# Altium PCB AlarmClockWith Mod.PcbDoc
Units mm, origin at the board's own origin, x right, y up, seen from the top; angles counter-clockwise.
Board outline 80.01 x 80.14 mm, 2 copper layers (Top Layer, Bottom Layer); 28 components, 25 nets, 108 pads, 0 vias.
Unrouted connection lines stored in the file: 6.
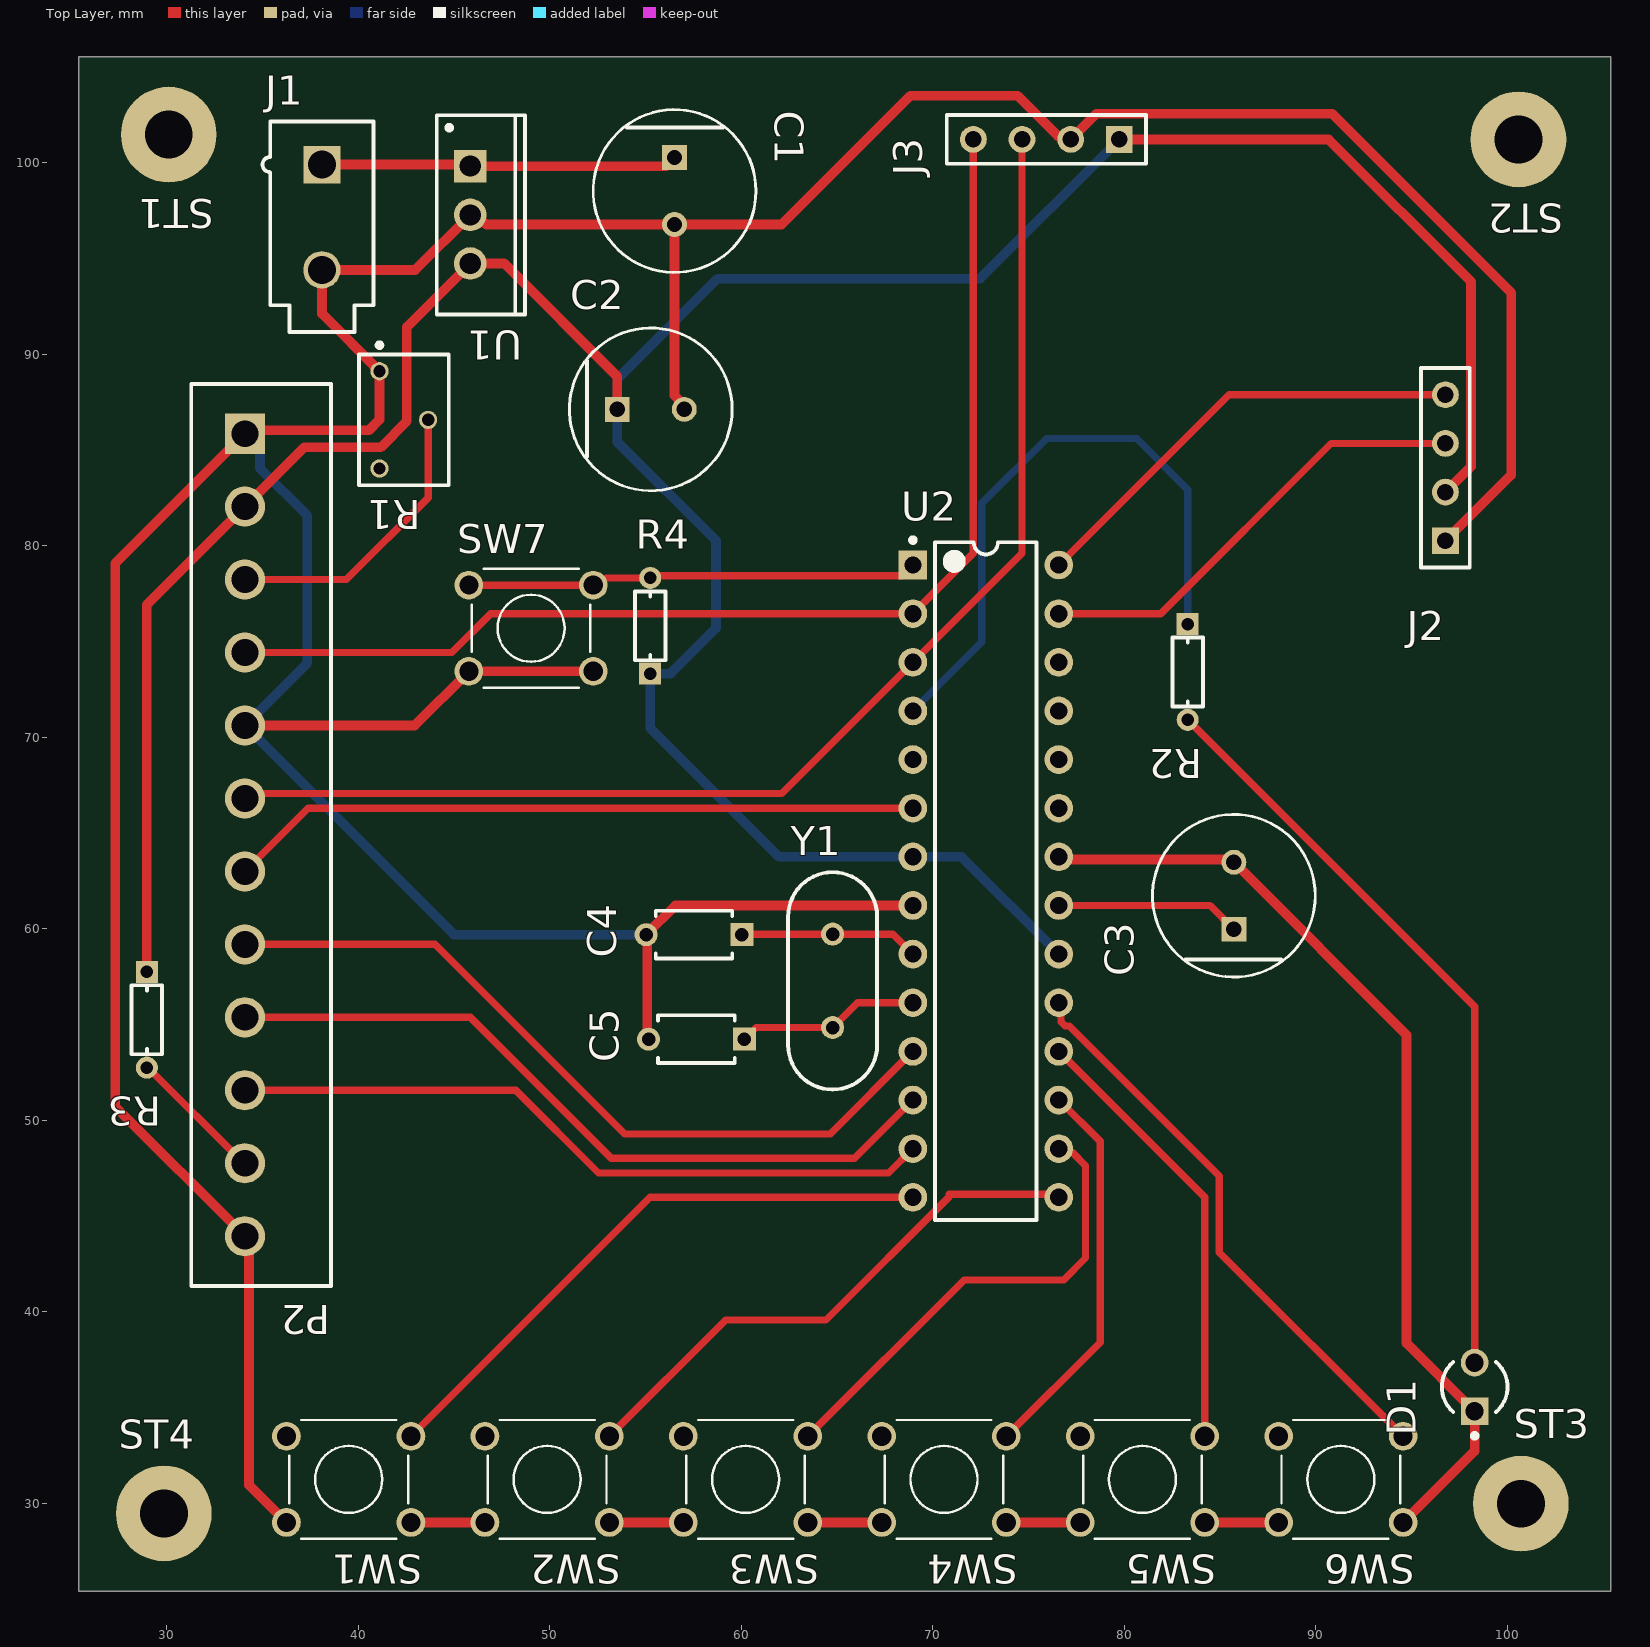
[diagram p0: Top Layer view]
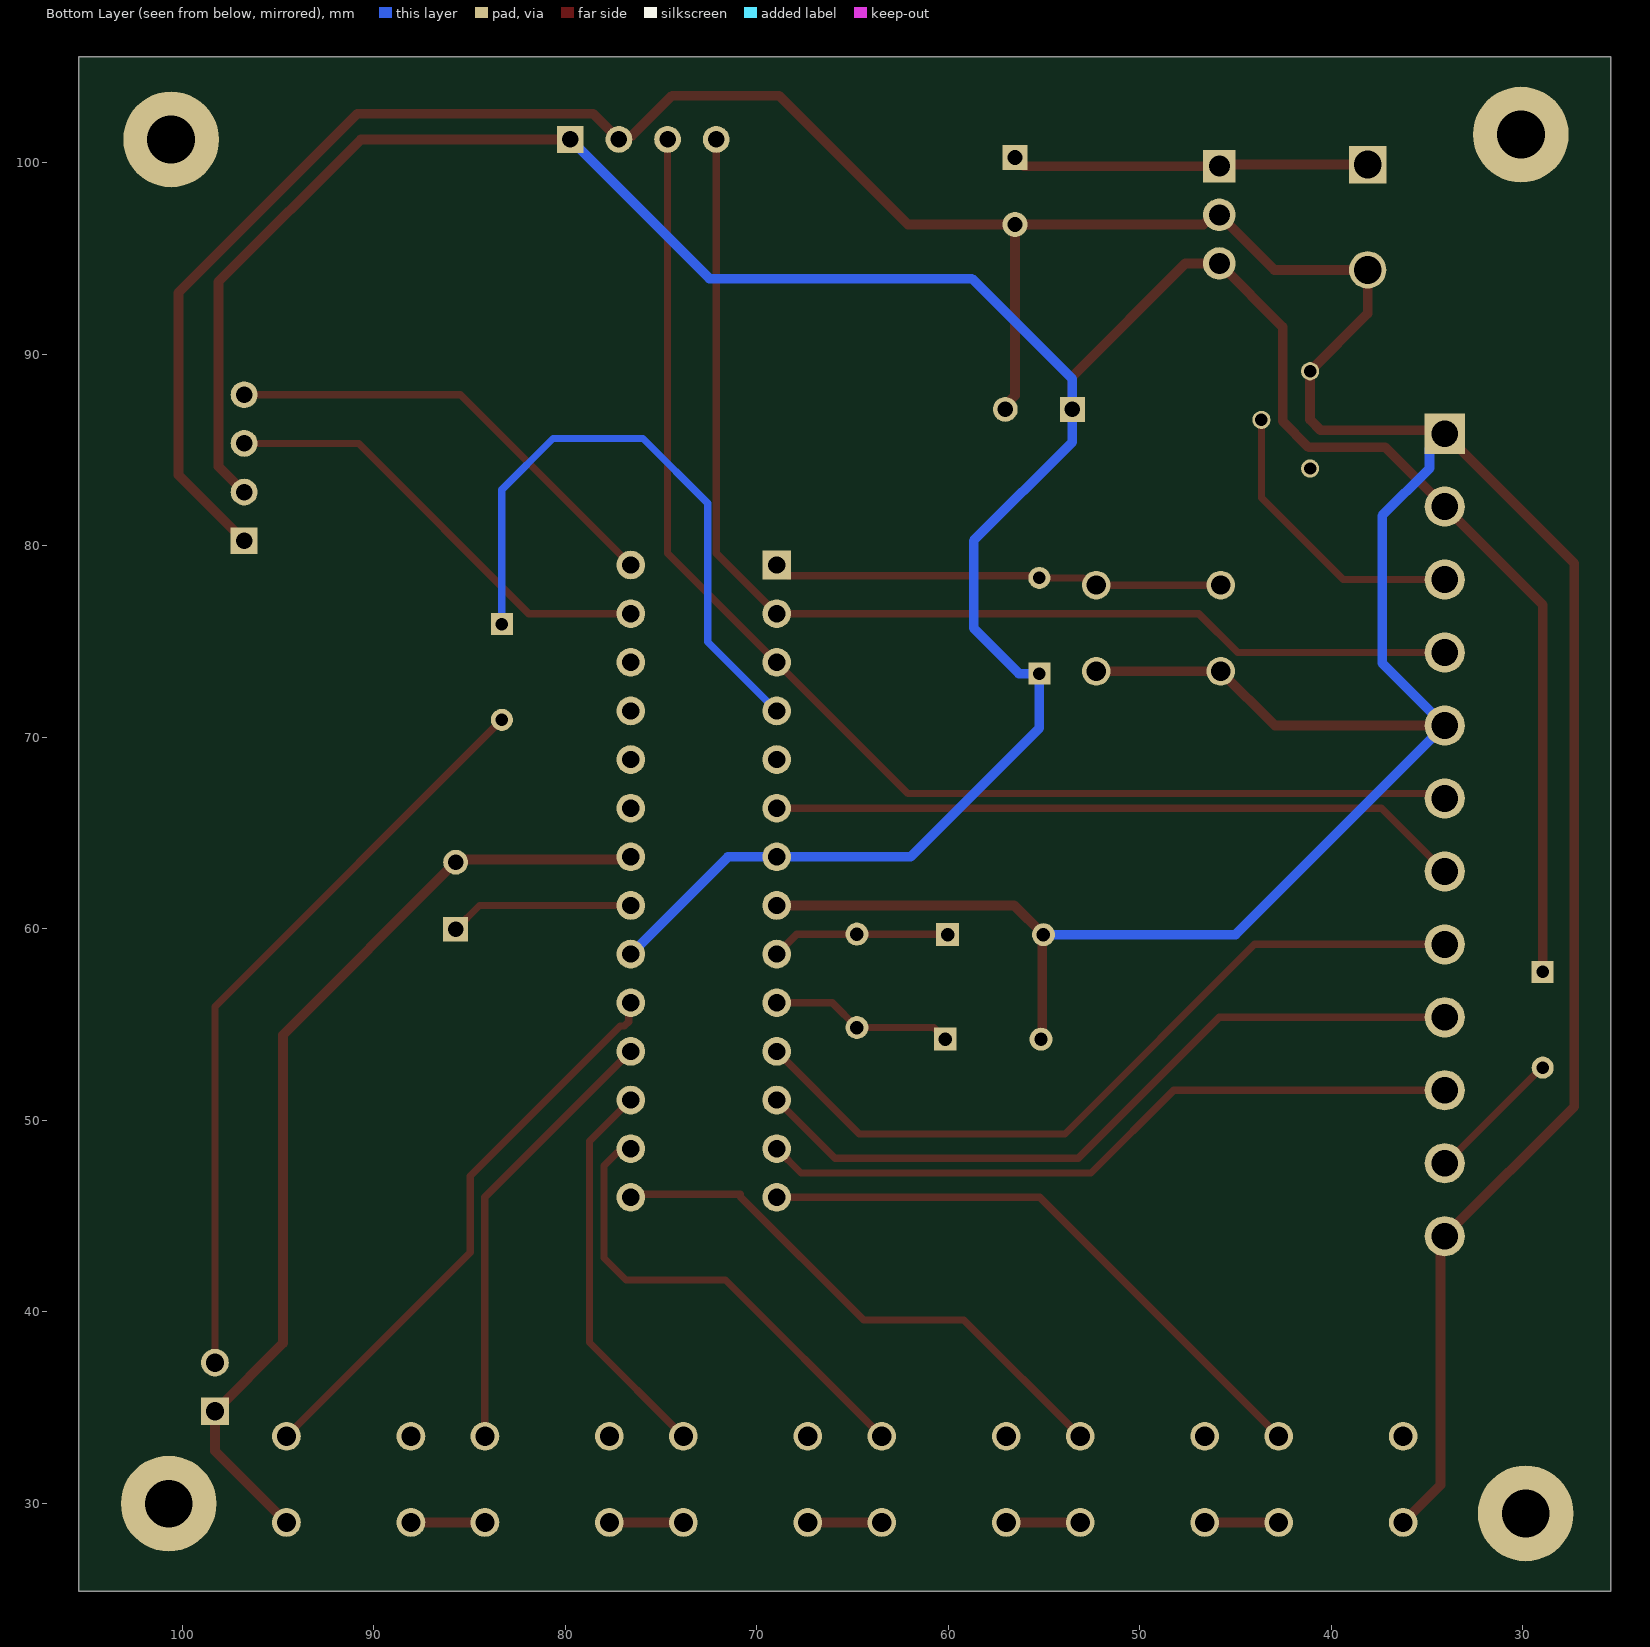
[diagram p1: Bottom Layer view, seen from below]
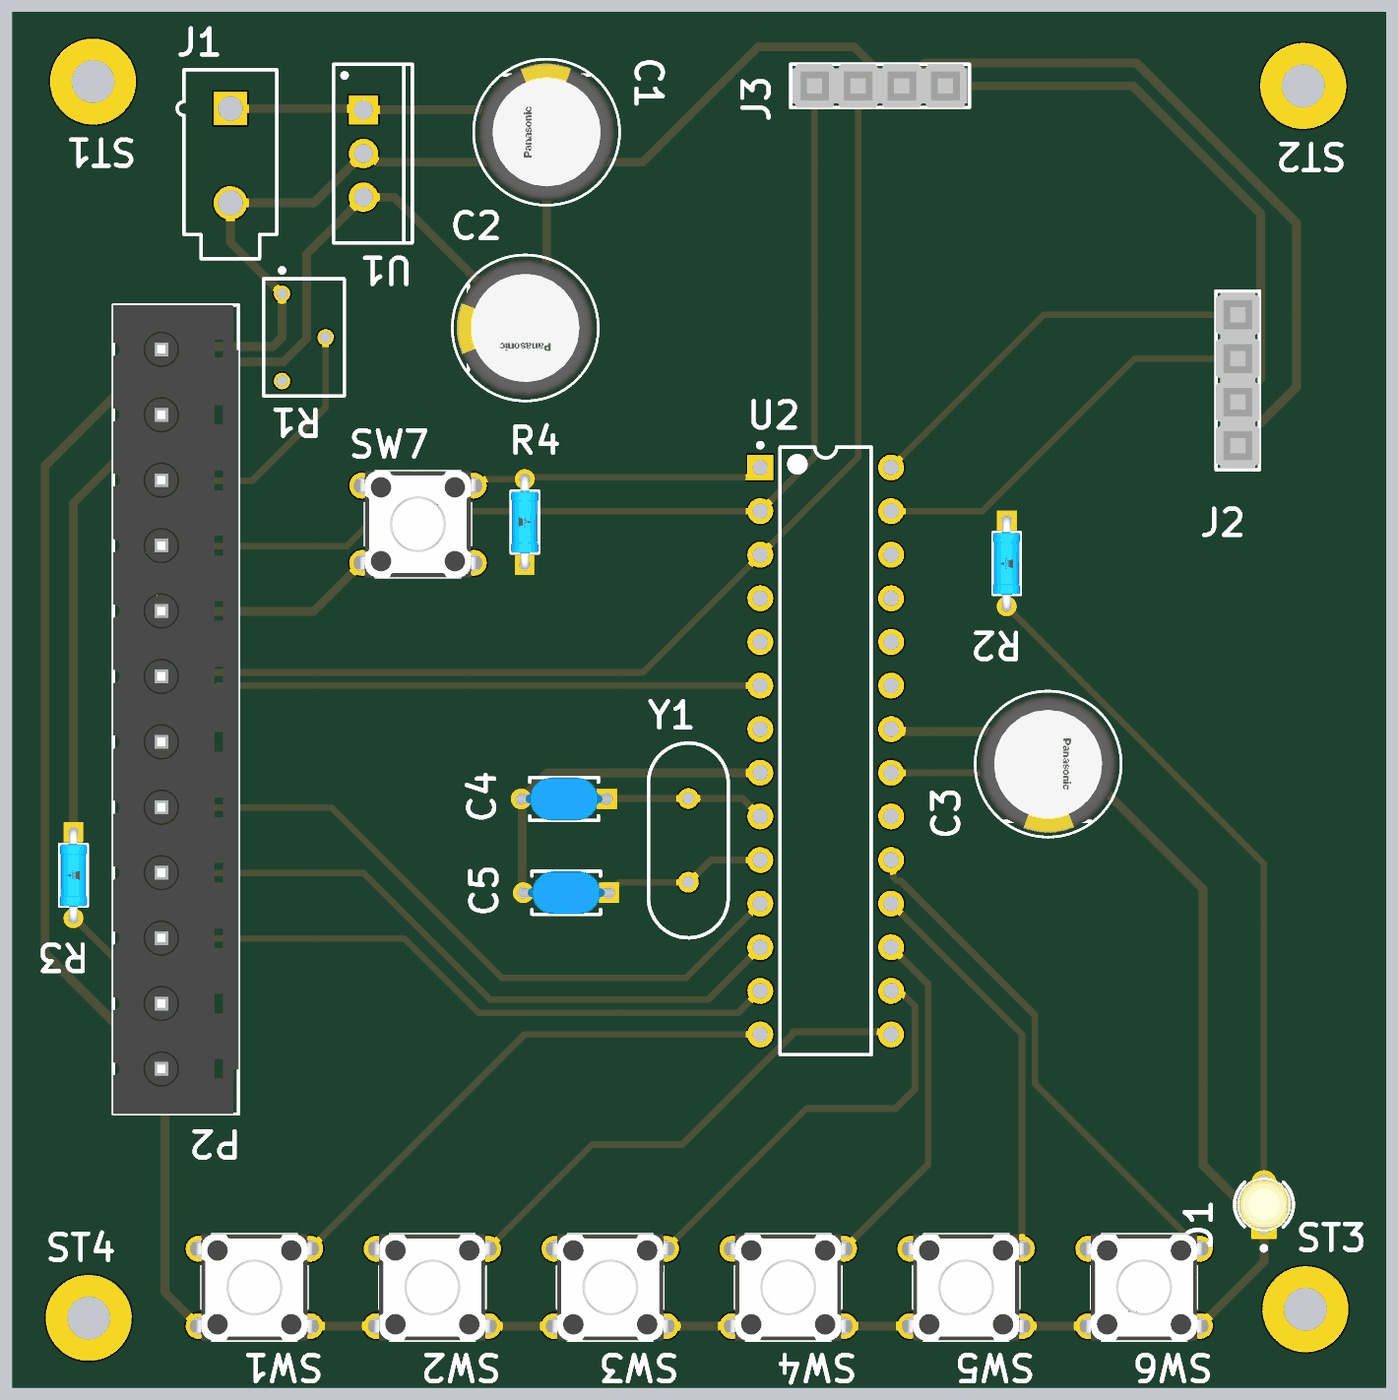
[diagram p2: 3D render of the assembled board from above, using the file's embedded part models]

## Layer stack, top to bottom
Top Solder: solder mask 0.0102, Solder Resist, Dk 3.5
Top Layer: signal copper 0.0356
Dielectric 1: dielectric 0.32, FR-4, Dk 4.8
Bottom Layer: signal copper 0.0356
Bottom Solder: solder mask 0.0102, Solder Resist, Dk 3.5

## Board outline
25.4,25.4 105.41,25.4 105.41,105.537 25.4,105.537

## Design rules (kind name [scope] priority, off if disabled: settings)
Clearance [All] p1: gap=0.381 ignorepadtopadclearanceinfootprint=FALSE except(0.508: Arc-Hole Track-Hole SMDPad-Hole THPad-Hole Via-Hole Fill-Hole Poly-Hole Region-Hole Text-Hole)
PolygonConnect [All] p1: connectstyle=Relief reliefconductorwidth=0.254 reliefentries=4 polygonreliefangle="90 Angle" airgapwidth=0.254
RoutingVias [All] p1: holewidth=0.711 width=1.27 viastyle="Through Hole" minholewidth=0.711 minwidth=1.27 maxholewidth=0.711 maxwidth=1.27
SolderMaskExpansion [All] p1: expansion=0.102 istentingtop=FALSE
Width Width_1 [InNet('5V') or InNet('GND') or InNet('VCC')] p1: maxlimit=0.635 minlimit=0.381 preferedwidth=0.508
Width [All] p2: maxlimit=0.508 minlimit=0.254 preferedwidth=0.381
30 further rules are at their usual default settings.

## Components (designator, comment, footprint, x,y, rotation, side; value= is the part's Value field where it differs from the comment)
C1 "330nF" FP-EEU-FC1V221L-MFG 56.515,98.524 r270 top
C2 "100nF" FP-EEU-FC1V221L-MFG 55.273,87.122 r0 top
C3 "100nF" FP-EEU-FC1V221L-MFG 85.725,61.722 r90 top
C4 "22pF" FP-RDE0M1-MFG 57.531,59.69 r180 top
C5 "22pF" FP-RDE0M1-MFG 57.658,54.229 r180 top
D1 "HLMP-1719" FP-HLMP-1719-MFG 98.298,36.068 r90 top
J1 "39-28-1023" MOLX-39-28-1023-2_V 38.1,97.155 r0 top
J2 "SLW-104-01-T-S" SMTC-SLW-104-01-X-S 96.774,80.264 r90 top
J3 "SLW-104-01-T-S" SMTC-SLW-104-01-X-S 79.741,101.219 r180 top
P2 "691701310012B" 691701310012B 34.925,64.897 r270 top
R1 "3266W-1-104LF" BOUR-3266W-3_V 42.375,86.573 r270 top
R2 "330" FP-MBA0204-MFG 83.312,73.406 r270 top
R3 "330" FP-MBA0204-MFG 28.956,55.245 r270 top value=220Ω
R4 "10k" FP-MBA0204-MFG 55.245,75.819 r90 top
ST1 "PTH-M2D5X5" PTH-M2D5X5 30.099,101.473 r180 top
ST2 "PTH-M2D5X5" PTH-M2D5X5 100.584,101.219 r180 top
ST3 "PTH-M2D5X5" PTH-M2D5X5 100.711,29.972 r0 top
ST4 "PTH-M2D5X5" PTH-M2D5X5 29.845,29.464 r0 top
SW1 "430186070716" 430186070716 39.497,31.242 r180 top
SW2 "430186070716" 430186070716 49.86,31.242 r180 top
SW3 "430186070716" 430186070716 60.223,31.242 r180 top
SW4 "430186070716" 430186070716 70.587,31.242 r180 top
SW5 "430186070716" 430186070716 80.95,31.242 r180 top
SW6 "430186070716" 430186070716 91.313,31.242 r180 top
SW7 "430186070716" 430186070716 49.022,75.692 r0 top
U1 "L7805CV" TO220 45.847,97.282 r270 top
U2 "ATmega328P-PU" 28P3 72.771,62.484 r0 top
Y1 "FOXSLF/120-20" FOX-FOXSLF-2_V 64.77,57.277 r90 top

## Footprints (in the part's own frame and the unit in brackets; to place one, negate y for a bottom-side part, rotate by r counter-clockwise, add the part's x,y. Pads: shape width x height; smd on the part's side, far side on the other; paste and mask are expansions set on the pad)
28P3 [mm] "28-Pin Plastic Dual In-Line Package (PDIP)"
  rect 1.5x1.5 hole 0.9: 1(-3.81,16.51)
  round 1.5 hole 0.9: 2(-3.81,13.97) 3(-3.81,11.43) 4(-3.81,8.89) 5(-3.81,6.35) 6(-3.81,3.81) 7(-3.81,1.27) 8(-3.81,-1.27) 9(-3.81,-3.81) 10(-3.81,-6.35) 11(-3.81,-8.89) 12(-3.81,-11.43) 13(-3.81,-13.97) 14(-3.81,-16.51) 15(3.81,-16.51) 16(3.81,-13.97) 17(3.81,-11.43) 18(3.81,-8.89) 19(3.81,-6.35) 20(3.81,-3.81) 21(3.81,-1.27) 22(3.81,1.27) 23(3.81,3.81) 24(3.81,6.35) 25(3.81,8.89) 26(3.81,11.43) 27(3.81,13.97) 28(3.81,16.51)
  silkscreen extent -3.93,-17.7 2.65,17.93, body extent -3.6,-17.65 3.6,17.65, height 4.58
430186070716 [mm] "6*6mm vertical type, THT, height 7.0mm, black actuator, 160gf, Bulk"
  round 1.5 hole 1: 1(-3.25,2.25) 2(-3.25,-2.25) 3(3.25,2.25) 4(3.25,-2.25)
  silkscreen extent -3.1,-3.1 3.1,3.1, body extent -3.95,-3.1 3.95,3.1, height 7.01
691701310012B [mm] "Vertical PCB Header THR Type, pitch 3.81mm, 12p"
  rect 2.1x2.1 hole 1.4: 1(-20.955,-0.85)
  round 2.1 hole 1.4: 2(-17.145,-0.85) 3(-13.335,-0.85) 4(-9.525,-0.85) 5(-5.715,-0.85) 6(-1.905,-0.85) 7(1.905,-0.85) 8(5.715,-0.85) 9(9.525,-0.85) 10(13.335,-0.85) 11(17.145,-0.85) 12(20.955,-0.85)
  silkscreen extent -23.55,-3.65 23.55,3.65, body extent -23.56,-3.65 23.55,3.65, height 9.25
BOUR-3266W-3_V [mm] "THD, 3-Leads, Body 6.6x4.69mm, Pitch 2.54mm"
  round 0.95 hole 0.65: 1(-2.54,-1.27) 2(0,1.27) 3(2.54,-1.27)
  silkscreen extent -4.02,-2.34 3.42,2.34, body extent -3.3,-2.35 3.3,2.35, height 8.51
FOX-FOXSLF-2_V [mm] "THD, 2-Leads, Body 11.35x4.65mm, Pitch 4.88mm"
  round 1.2 hole 0.7: 1(-2.44,0) 2(2.44,0)
  silkscreen extent -5.68,-2.32 5.68,2.32, body extent -5.67,-2.32 5.68,2.32, height 3.6
FP-EEU-FC1V221L-MFG [mm]
  rect 1.3x1.3 hole 0.8 paste-1000 mask+0: 1(-1.75,0)
  round 1.3 hole 0.8 paste-1000 mask+0: 2(1.75,0)
  silkscreen extent -4.25,-4.25 4.25,4.25, body extent -4.35,-4.35 4.35,4.35, height 0.25
FP-HLMP-1719-MFG [mm]
  rect 1.45x1.45 hole 0.95 paste-1000 mask+0: 1(-1.27,0)
  round 1.45 hole 0.95 paste-1000 mask+0: 2(1.27,0)
  silkscreen extent -2.67,-1.71 1.3,1.71, body extent -2.22,-2.22 2.22,2.22, height 0.25
FP-MBA0204-MFG [mm]
  rect 1.15x1.15 hole 0.65 paste-1000 mask+0: 1(-2.5,0)
  round 1.15 hole 0.65 paste-1000 mask+0: 2(2.5,0)
  silkscreen extent -1.8,-0.8 1.8,0.8, body extent -3.17,-0.9 3.17,0.9, height 0.25
FP-RDE0M1-MFG [mm]
  rect 1.2x1.2 hole 0.7 paste-1000 mask+0: 1(-2.5,0)
  round 1.2 hole 0.7 paste-1000 mask+0: 2(2.5,0)
  silkscreen extent -2,-1.25 2,1.25, body extent -3.2,-1.35 3.2,1.35, height 0.25
MOLX-39-28-1023-2_V [mm] "THD, 2-Leads, Body 11x5.8mm"
  rect 1.95x1.95 hole 1.45: 1(0,2.75)
  round 1.95 hole 1.45: 2(0,-2.75)
  silkscreen extent -3.1,-6 2.7,5, body extent -3.1,-6 2.7,5, height 13.6
PTH-M2D5X5 [mm]
  round 5 hole 2.5: 1(0,0)
SMTC-SLW-104-01-X-S [mm] "Low Profile Socket Strip, 1x4 Pins, Vertical, 2.54mm Pitch, Female"
  rect 1.4x1.4 hole 0.86: 1(0,0)
  round 1.4 hole 0.86: 2(2.54,0) 3(5.08,0) 4(7.62,0)
  silkscreen extent -1.4,-1.27 9.02,1.27, body extent -1.27,-1.27 8.89,1.27, height 4.57
TO220 [mm] "TO, Thru-Hole, Vertical, Heatsink Mounted; 3 In-Line Leads; Pitch 2.54 mm"
  rect 1.7x1.7 hole 1.1: 1(-2.54,0)
  round 1.7 hole 1.1: 2(0,0) 3(2.54,0)
  silkscreen extent -5.2,-1.75 5.2,2.85, body extent -5.25,-1.8 5.25,2.9, height 19.7

## Part data
C1 C2 C3: library part CMP-05427-000010-1, "CAP ALUM 220UF 20% 35V RADIAL", Leakage Current=77uA, Manufacturer="Panasonic Electronic Components", Manufacturer Part Number=EEU-FC1V221L, Package=0, Ripple Current=730mA, Temperature="-55°C to +105°C", Temperature Range High=+105°C, Temperature Range Low=-55°C, Tolerance=20%, Voltage Rating=35V, Automotive=Yes, Automotive Grade="Grade 2", Category=Cap, ComponentLink2Description=Datasheet, ComponentLink2URL=https://industrial.panasonic.com/cdbs/www-data/pdf/RDF0000/ABA0000C1209.pdf, Device Class L1="Passive Components", Device Class L2=Capacitors, Device Class L3="Aluminum Electrolytic Capacitors", Digikey Description="CAP ALUM 220UF 20% 35V RADIAL", Dissipation Factor=12%, Esr=0.085Ω, Height=16.5mm, Lead Free=Yes, Life=2000Hours, Material=Aluminum, Mouser Description="Capacitor; Aluminum Electrolytic; Fc Radial Elec Cap 220uF 35V", Octopart=https://octopart.com/eeu-fc1v221l-panasonic-39478519, RoHS=TRUE
  C1: Capacitance=330nF
  C2 C3: Capacitance=100nF
C4 C5: library part CMP-06035-051680-1, "Ceramic Capacitor 100nF ±10% 50V X7R Radial", Case/Package=Radial, Dielectric=X7R, Max Operating Temperature=125°C, Min Operating Temperature=-55°C, Package Quantity=2000, Resistor Type=Ceramic, Tolerance=10%, Voltage Rating=50V, Capacitance=22pF, Height=3.5mm, Height - Seated (Max)=0.236inch, Lead Diameter=0.5mm, Lead Free="Lead Free", Lead Pitch=0.197inch, Lead/Base Style=Kinked, Length=0.157inch, Mount="Through Hole", Packaging="Tape and Reel", Termination=Radial, Voltage Rating (DC)=50V, Width=3.5mm
D1: library part CMP-2000-06410-2, "LED YELLOW DIFFUSED T-1 T/H", Colour=Yellow, Forward Current=2mA, Forward Voltage=1.8V, Manufacturer=Broadcom, Package=0, Power Dissipation=17.5mW, Reverse Voltage=5V, Temperature="-40°C to +100°C", Temperature Range High=+100°C, Temperature Range Low=-40°C, Automotive=No, Category=Diode, ComponentLink2Description=Datasheet, ComponentLink2URL=https://docs.broadcom.com/docs/AV02-1557EN, Device Class L1=Optoelectronics, Device Class L2=LEDs, Device Class L3=unset, Digikey Description="LED YELLOW DIFFUSED T-1 T/H", Lead Free=Yes, Led Orientation=Straight, Luminous Intensity=2.1mcd, Manufacturer Part Number=HLMP-1719, Mouser Description="Standard LEDs - Through Hole Yellow Diffused 585nm 2.1mcd", Octopart=https://octopart.com/hlmp-1719-broadcom-71130405, RoHS=TRUE, Viewing Angle=50°, Wavelength=585nm
J1: library part CMP-2000-05244-1, "Female Header, Pitch 4.2 mm, 1 x 2 Position, Height 12.8 mm, Tail Length 3.5 mm, -40 to 105 degC, RoHS", Colour=Clear, Current Rating=13A, Flammability Rating=UL94V-2, Manufacturer=Molex, Voltage Rating V AC=600V, Working Voltage=250V, Connector Body Material=–, Connector Insert Type=Header, Connector Mounting=PCB, Connector Mounting Orientation=PCB, Connector Type=RectangularPower, Contact Gender=–, Contact Material=Brass, Contact Plating=Tin, Contact Termination=Solder, Datasheet URL=https://datasheet.ciiva.com/11746/0900766b80460d9e-11746456.pdf, Datasheet Version="Rev. F, 05/2004", Gender=Header, Lead Spacing=4.2mm, Manufacturer URL=http://www.molex.com/, Mounting Orientation=Straight, Mounting Type=PCBoard, MSL=–, No. of Contacts=4, No. of Poles=2, No. of Rows=1, No. of Ways=2, Pitch Spacing=4.2mm, Series=Mini-FitJr, SVHC=–, Termination Method=Solder
J2 J3: library part CMP-1023-00131-1, "Low Profile Socket Strips, Through-hole, Vertical, -55 to 105 degC, 2.54 mm Pitch, 4-Pin, Female, RoHS", Manufacturer=Samtec, Temperature Range="-55 to 105 degC", ComponentLink1Description="Manufacturer URL", ComponentLink1URL=http://www.samtec.com, ComponentLink2Description=Datasheet, ComponentLink2URL=http://www.samtec.com/documents/webfiles/pdf/SLW.PDF, ComponentLink3Description="Package Specification", ComponentLink3URL=http://www.samtec.com/documents/webfiles/cpdf/SLW-1XX-01-X-X-MKT.pdf, DatasheetVersion=F-214, Mounting Technology=Through-hole, Orientation=Vertical, PackageDescription="Low Profile Socket Strip", PackageReference=SLW-104-01-X-S, PackageVersion="X, 9/1987", PartNumber=SLW-104-01-T-S, Pitch="2.54 mm", RoHS=True
P2: library part CMP-1502-01991-1, "Serie 7013 B - 3.81mm Vertical PCB Header THR Type WR-TBL, 12 pin", Manufacturer="Wurth Elektronik", Operating Temperature=-40to105degC, Datasheet URL=http://katalog.we-online.de/em/datasheet/6917013100xxB.pdf, Gender=Male, Manufacturer URL=http://www.we-online.de, Mounting Technology=SMT, Package Reference=691701310012B, Packaging=Box, Part Number=691701310012B, Pin Number=12, Pitch=3.81mm, Publisher=WurthElektronik
R1: library part CMP-0975-00021-1, "Square Trimpot Trimming Potentiometer, 100 KOhm, 0.25 W, -55 to 125 degC, 3-Pin THD, RoHS, Tube", Manufacturer=Bourns, Operating Temperature="-55 to 125 degC", Power Rating@70 degC="0.25 W", Resistance="100 kOhm", Tolerance=+/-10%, ComponentLink1Description="Manufacturer URL", ComponentLink1URL=https://www.bourns.com/, ComponentLink2Description=Datasheet, ComponentLink2URL=https://www.bourns.com/data/global/pdfs/3266.pdf, ComponentLink3Description="Package Specification", ComponentLink3URL=https://www.bourns.com/data/global/pdfs/3266.pdf, DatasheetVersion=Apr-14, Mounting Technology="Through Hole", PackageDescription="3-Pin THD, Body 6.35 x 4.31 mm, Pitch 2.54 mm", Packing=Tube, PartNumber=3266W-1-104LF, RoHS=TRUE
R2: library part CMP-02408-000005-1, "RES 220 OHM 0.4W 1% AXIAL", Manufacturer="Vishay BC Components", Manufacturer Part Number=MBA02040C2200FC100, Package=MBA0204, Power Rating=0.25W, Temperature="-55°C to +125°C", Temperature Coefficient=50ppm/°C, Temperature Range High=+125°C, Temperature Range Low=-55°C, Tolerance=1%, Voltage Rating=200V, Automotive=Yes, Automotive Grade="Grade 1", Category=Res, ComponentLink2Description=Datasheet, ComponentLink2URL=http://www.vishay.com/docs/28766/mbxsma.pdf, Composition="Metal Film", Device Class L1="Passive Components", Device Class L2=Resistors, Device Class L3="Through-Hole Resistors", Digikey Description="RES 220 OHM 0.4W 1% AXIAL", Height=1.6mm, Ipc Land Pattern Name=RESAD500W65L360D160, Lead Free=Yes, Mouser Description="Thin Film Resistors - Through Hole .4watt 220ohms 1% 1/8watt body size", Octopart=https://octopart.com/mba02040c2200fc100-vishay-43743094, Resistance=330, RoHS=TRUE, Series="MBA/SMA 0204"
R3 R4: library part CMP-02408-000005-1, "RES 220 OHM 0.4W 1% AXIAL", Manufacturer="Vishay BC Components", Manufacturer Part Number=MBA02040C2200FC100, Package=MBA0204, Power Rating=0.25W, Resistance=220Ω, Temperature="-55°C to +125°C", Temperature Coefficient=50ppm/°C, Temperature Range High=+125°C, Temperature Range Low=-55°C, Tolerance=1%, Voltage Rating=200V, Automotive=Yes, Automotive Grade="Grade 1", Category=Res, ComponentLink2Description=Datasheet, ComponentLink2URL=http://www.vishay.com/docs/28766/mbxsma.pdf, Composition="Metal Film", Device Class L1="Passive Components", Device Class L2=Resistors, Device Class L3="Through-Hole Resistors", Digikey Description="RES 220 OHM 0.4W 1% AXIAL", Height=1.6mm, Ipc Land Pattern Name=RESAD500W65L360D160, Lead Free=Yes, Mouser Description="Thin Film Resistors - Through Hole .4watt 220ohms 1% 1/8watt body size", Octopart=https://octopart.com/mba02040c2200fc100-vishay-43743094, RoHS=TRUE, Series="MBA/SMA 0204"
ST1 ST2 ST3 ST4: library part CMP-00028-00004-1, "M2 PTH (2.5mm), 5mm pad", Pins=1
SW1 SW2 SW3 SW4 SW5 SW6 SW7: library part CMP-1453-00013-1, "WS-TATV THT Tact Switch 6X6 mm", Manufacturer="Wuerth Elektronik", ComponentLink1Description="Manufacturer URL", ComponentLink1URL=http://www.we-online.com, ComponentLink2Description=Datasheet, ComponentLink2URL=http://katalog.we-online.de/em/datasheet/4301x6.pdf, NoPins=04, PackageReference=430186070716, PartNumber=430186070716
U1: library part CMP-019-00018-2, "Positive Voltage Regulator IC, 1.5 A, 5 V, 0 to 125 degC, 3-Pin TO-220, RoHS, Tube", Case/Package=TO-220, Dropout Voltage=2V, Manufacturer=STMicroelectronics, Max Input Voltage=35V, Max Operating Temperature=125°C, Max Ouput Current=1.5A, Max Supply Voltage=20V, Min Input Voltage=7V, Min Operating Temperature=0°C, Min Supply Voltage=8V, Nominal Output Voltage=5V, Package Quantity=50, Datasheet URL=https://datasheet.ciiva.com/15111/getdatasheetpartid-44136-15111027.pdf, Datasheet Version="Rev 30, 09/2012", Manufacturer URL=http://www.st.com/, Mounting Technology=TH, Output Current=1.5A, Output Voltage=5V, Outputs=1, Packaging=Rail/Tube, Pins=3, RoHS Compliant=True
U2: library part CMP-0095-00013-2, "8-bit AVR Microcontroller, 32KB Flash, 1KB EEPROM, 2KB SRAM, 28-pin PDIP, Industrial Grade (-40°C to 85°C)", ComponentLink1Description="Manufacturer URL", ComponentLink1URL=http://www.atmel.com/, ComponentLink2Description="ATmega48A/48PA/88A/88PA/168A/168PA/328/328P Datasheet", ComponentLink2URL=http://www.atmel.com/dyn/resources/prod_documents/8271.pdf, ComponentLink3Description="ATmega48A/48PA/88A/88PA/168A/168PA/328/328P Summary", ComponentLink3URL=http://www.atmel.com/dyn/resources/prod_documents/8271S.pdf, DatasheetVersion="revD, May-2011", PackageDescription="28-lead (0.300\"/7.62mm Wide) Plastic Dual Inline Package (PDIP)", PackageReference=28P3, PackageVersion="revB, Sep-2001", RevisionNote="DatasheetVersion updated. URLs added."
Y1: library part CMP-1749-00004-1, "Resistance Weld Thru-Hole Crystal, 12 MHz, +/-30 ppm, -20 to 70 degC, 2-Pin THD, RoHS, Bulk", Case\Package=TO-251-3, Input Capacitance="350 pF", Max Operating Temperature="150 degC", Max Power Dissipation="2.5 W", Min Operating Temperature="-55 degC", Package Quantity=70, ComponentLink1Description="Manufacturer URL", ComponentLink1URL=http://www.foxonline.com/, ComponentLink2Description=Datasheet, ComponentLink2URL=http://www.foxonline.com/pdfs/hc49slf.pdf, DatasheetVersion=Mar-15, Elements=1, Height="6.1 mm", Length="6.6 mm", Mount="Through Hole", PackageDescription="2-Pin Through Hole Device, Body 11.35 x 4.65 mm, Pitch 4.88 mm", PackageReference=FOXSLF-2, Packaging=Rail/Tube, Pins=3, Radiation Hardening=No, Rds On Max="115 mohm", REACH SVHC="No SVHC", RoHSCompliant=true, Typical Rise Time="90 ns", Width="2.3 mm"

## Nets (pads, with @x,y where several pads share a name; then routed paths per layer and width w, separated by ;. In a path a pad name is that pad's centre, name@x,y a point inside that pad or via, vN(x,y) a via of type N, cw(c..) or ccw(c..) an arc to the next point about the centre after c; other vN are vias at no path point)
5V: C2.1 J2.2 J3.1 P2.2 R3.1 R4.1 U1.3 U2.7 U2.20 | length 171.2
  Top Layer w0.508: R3.1 28.956,76.923 P2.2 37.176,85.143 41.176,85.143 42.535,86.502 42.535,91.43 U1.3 47.625,94.742 53.523,88.844 C2.1 ; J3.1 90.678,101.219 98.109,93.788 98.109,84.139 J2.2
  Bottom Layer w0.508: U2.20 71.501,63.754 U2.7 61.976,63.754 55.245,70.485 R4.1 56.301,73.319 58.674,75.692 58.674,80.264 53.523,85.415 53.523,88.702 58.769,93.948 72.47,93.948 J3.1
ALARM: SW5.2 U2.18 | length 23.3
  Top Layer w0.381: U2.18@76.581,53.55 U2.18 84.2,45.975 SW5.2
BACK: SW6.2 U2.19 | length 30.2
  Top Layer w0.381: U2.19 76.693,56.022 76.693,55.139 76.916,54.916 77.128,54.916 84.962,47.082 84.962,43.093 SW6.2
D0: J3.4 P2.4 U2.2 | length 61.8
  Top Layer w0.381: P2.4 44.883,74.422 46.915,76.454 U2.2 72.121,79.614 J3.4
D1: J3.3 P2.6 U2.3 | length 67.5
  Top Layer w0.381: P2.6 34.329,67.056 62.103,67.056 74.661,79.614 J3.3
D4: P2.7 U2.6 | length 36.4
  Top Layer w0.381: P2.7@34.075,63.119 P2.7 37.377,66.294 U2.6
D5: P2.8 U2.11 | length 40.8
  Top Layer w0.381: P2.8 44.004,59.182 53.91,49.276 64.643,49.276 U2.11 U2.11@68.899,53.594
D6: P2.9 U2.12 | length 39.2
  Top Layer w0.381: P2.9 45.847,55.372 53.213,48.006 65.913,48.006 U2.12
D7: P2.10 U2.13 | length 37.2
  Top Layer w0.381: P2.10 48.225,51.562 52.543,47.244 67.691,47.244 U2.13
DEC: SW3.2 U2.16 | length 25
  Top Layer w0.381: SW3.2 71.637,41.656 76.835,41.656 77.978,42.799 77.978,47.625 77.303,48.3 76.795,48.3 U2.16
GND: C1.2 C2.2 C3.2 C4.2 C5.2 D1.1 J1.2 J2.1 J3.2 P2.1 P2.5 P2.12 R1.1 SW1.1 SW1.3 SW2.1 SW2.3 SW3.1 SW3.3 SW4.1 SW4.3 SW5.1 SW5.3 SW6.1 SW6.3 SW7.2 SW7.4 U1.2 U2.8 U2.22 | length 328.5
  Top Layer w0.508: P2.5 42.942,70.612 SW7.2 SW7.4 ; SW1.3 34.29,30.949 34.29,43.727 P2.12 27.305,50.712 27.305,79.082 P2.1 34.255,86.032 40.556,86.032 41.105,86.581 R1.1 38.1,92.118 J1.2 42.97,94.405 U1.2 46.17,97.282 46.678,96.774 C1.2 ; SW1.1 SW2.3 ; SW2.1 SW3.3 ; C5.2 55.094,54.292 55.094,59.627 C4.2 56.555,61.214 U2.8 ; C2.2 57.023,87.336 56.515,87.844 C1.2 ; SW3.1 SW4.3 ; SW4.1 SW5.3 ; U2.22 76.722,63.613 85.584,63.613 C3.2 94.742,54.455 94.742,38.354 D1.1 98.298,32.727 SW6.1 ; SW5.1 SW6.3 ; J2.1 100.203,83.693 100.203,93.218 90.867,102.554 78.536,102.554 J3.2 77.03,101.39 76.537,101.39 74.422,103.505 68.834,103.505 62.103,96.774 C1.2
  Bottom Layer w0.381: C5.2@55.158,54.058 C5.2
  Bottom Layer w0.508: P2.1 34.871,85.056 34.871,84.04 37.338,81.573 37.338,73.875 P2.5 44.997,59.69 C4.2
INC: SW2.2 U2.15 | length 28.8
  Top Layer w0.381: SW2.2 59.185,39.566 64.422,39.566 70.866,46.01 70.866,46.132 76.423,46.132 U2.15
LED: R2.1 U2.4 | length 32.6
  Bottom Layer w0.381: U2.4 72.561,74.974 72.561,82.213 75.946,85.598 80.645,85.598 83.312,82.931 R2.1
MODE: SW1.2 U2.14 | length 31.4
  Top Layer w0.381: SW1.2 55.229,45.974 U2.14
NetC3_1: C3.1 U2.21 | length 9.7
  Top Layer w0.381: U2.21 84.483,61.214 C3.1
NetC4_1: C4.1 U2.9 Y1.2 | length 9.4
  Top Layer w0.381: C4.1 60.058,59.717 Y1.2 67.918,59.717 U2.9
NetC5_1: C5.1 U2.10 Y1.1 | length 9.6
  Top Layer w0.381: C5.1 60.766,54.837 Y1.1 66.067,56.134 U2.10
NetD1_2: D1.2 R2.2 | length 39.8
  Top Layer w0.381: R2.2 98.298,55.92 D1.2
NetP2_3: P2.3 R1.2 | length 15.4
  Top Layer w0.381: P2.3 39.37,78.232 43.645,82.507 R1.2
NetP2_11: P2.11 R3.2 | length 7.2
  Top Layer w0.381: R3.2 29.019,52.745 34.012,47.752 P2.11
RESET: R4.2 SW7.1 SW7.3 U2.1 | length 23.6
  Top Layer w0.381: SW7.1 SW7.3 52.575,77.942 52.952,78.319 R4.2 55.36,78.434 68.401,78.434 U2.1
SCL: J2.4 U2.28 | length 23.9
  Top Layer w0.381: U2.28 85.471,87.884 J2.4
SDA: J2.3 U2.27 | length 23.9
  Top Layer w0.381: U2.27 81.902,76.454 90.792,85.344 J2.3
SET: SW4.2 U2.17 | length 20.6
  Top Layer w0.381: SW4.2@73.735,33.594 SW4.2 78.74,38.395 78.74,48.895 U2.17
VCC: C1.1 J1.1 U1.1 | length 19.1
  Top Layer w0.381: C1.1@56.205,100.584 C1.1
  Top Layer w0.508: J1.1 45.764,99.905 U1.1 56.063,99.822 C1.1
pads on no net: R1.3 ST1.1 ST2.1 ST3.1 ST4.1 SW1.4 SW2.4 SW3.4 SW4.4 SW5.4 SW6.4 U2.5 U2.23 U2.24 U2.25 U2.26